# Altium PCB PCB1.PcbDoc
Units mm, origin at the board's own origin, x right, y up, seen from the top; angles counter-clockwise.
Board outline 52 x 75 mm, 2 copper layers (Top Layer, Bottom Layer); 11 components, 25 nets, 104 pads, 6 vias.
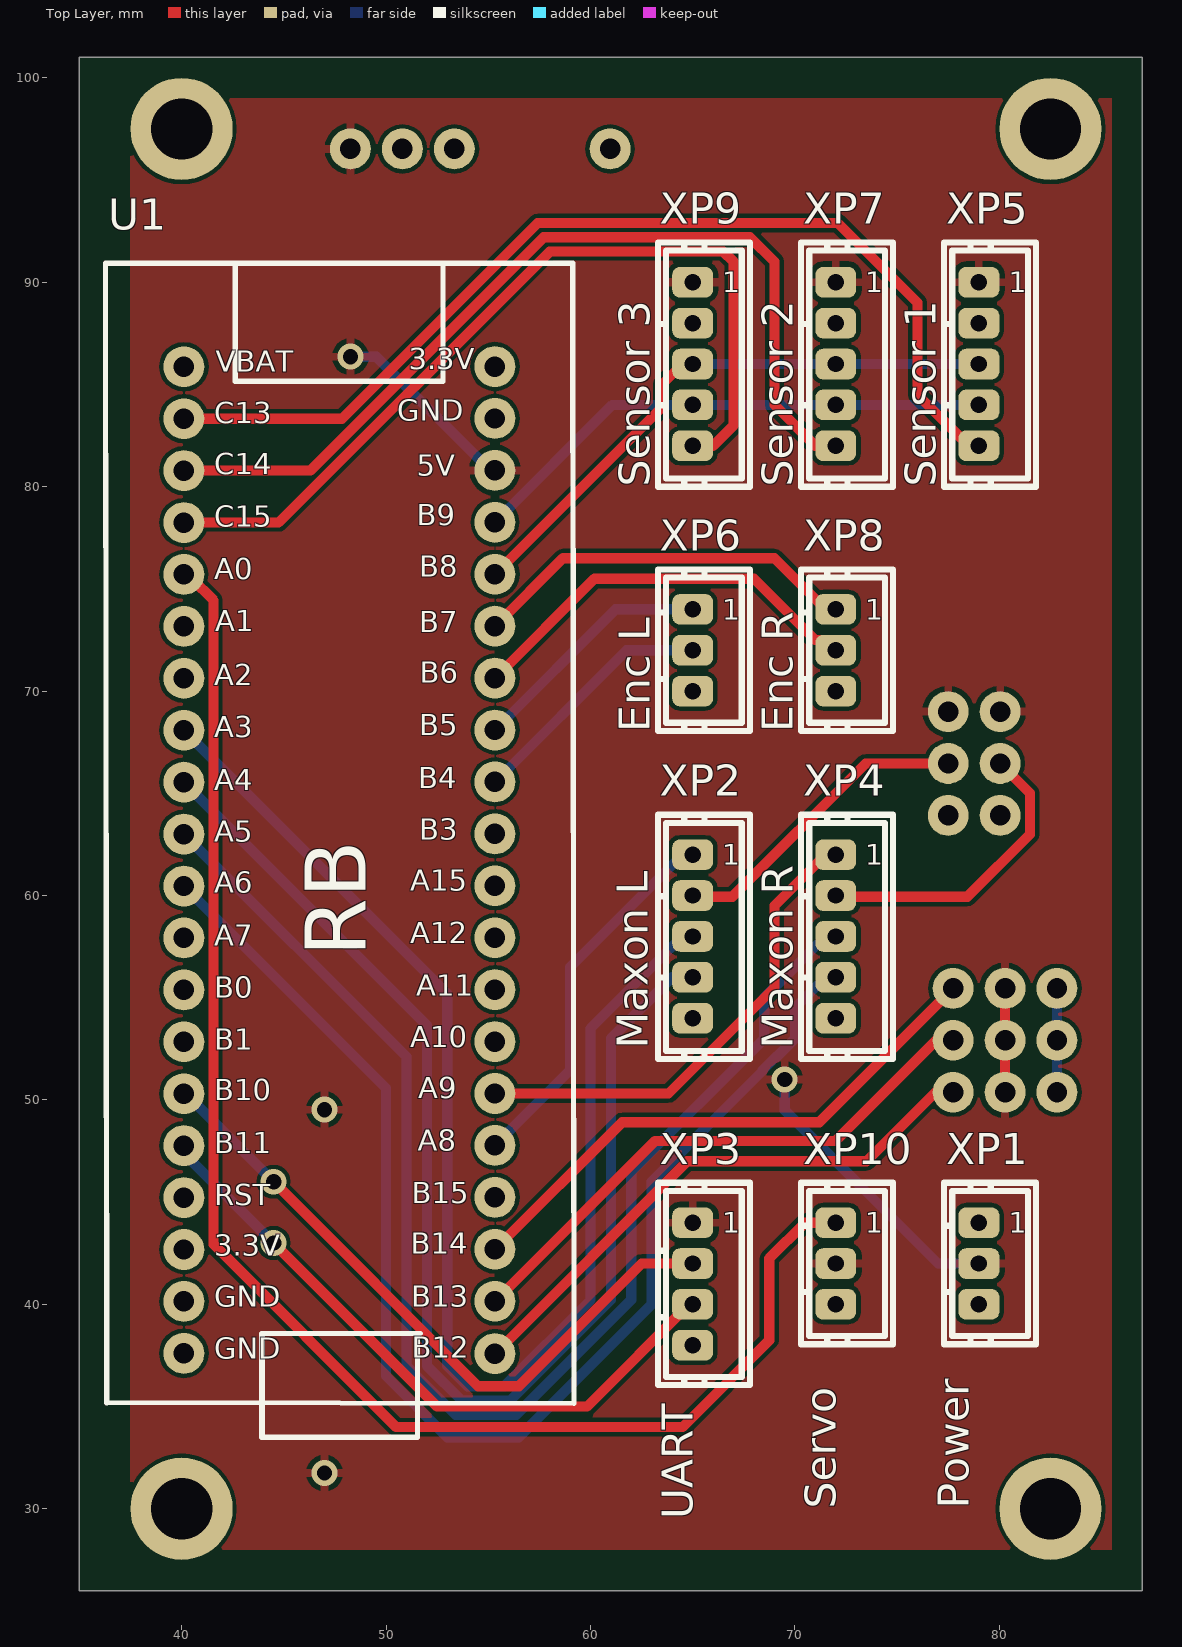
[diagram p0: Top Layer view]
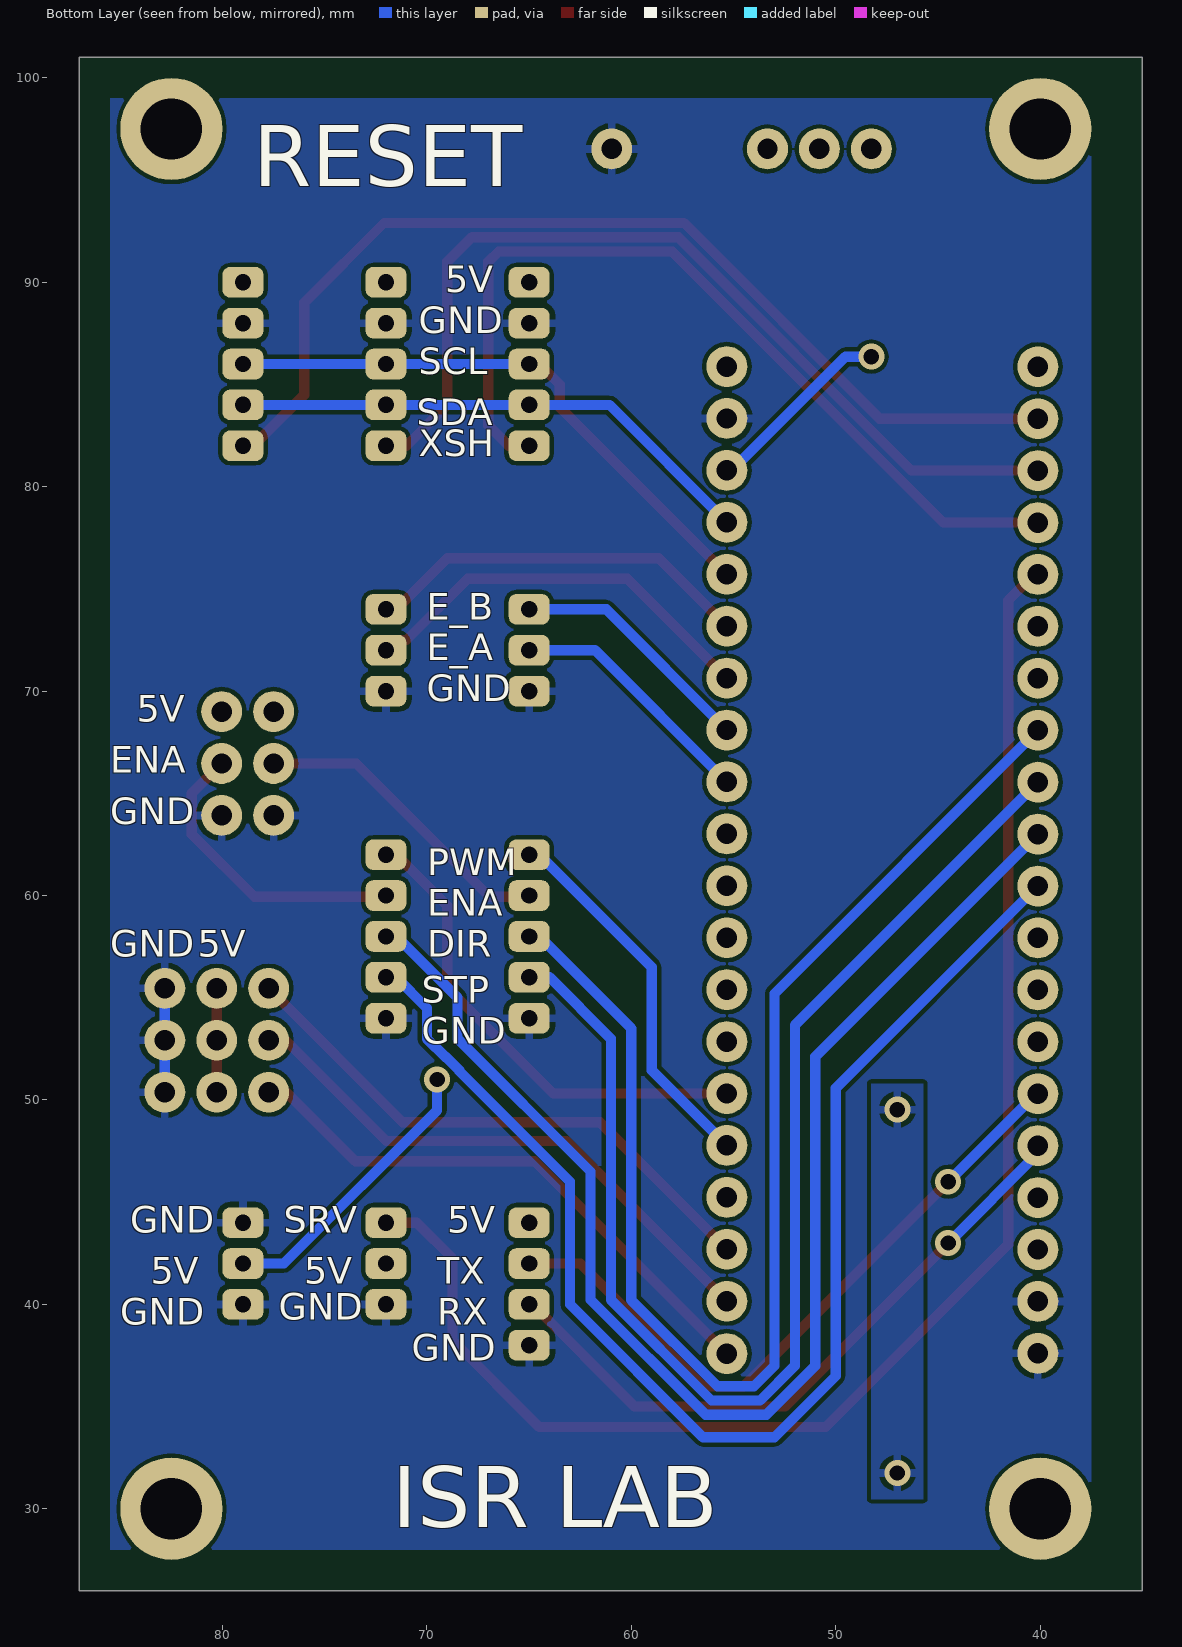
[diagram p1: Bottom Layer view, seen from below]
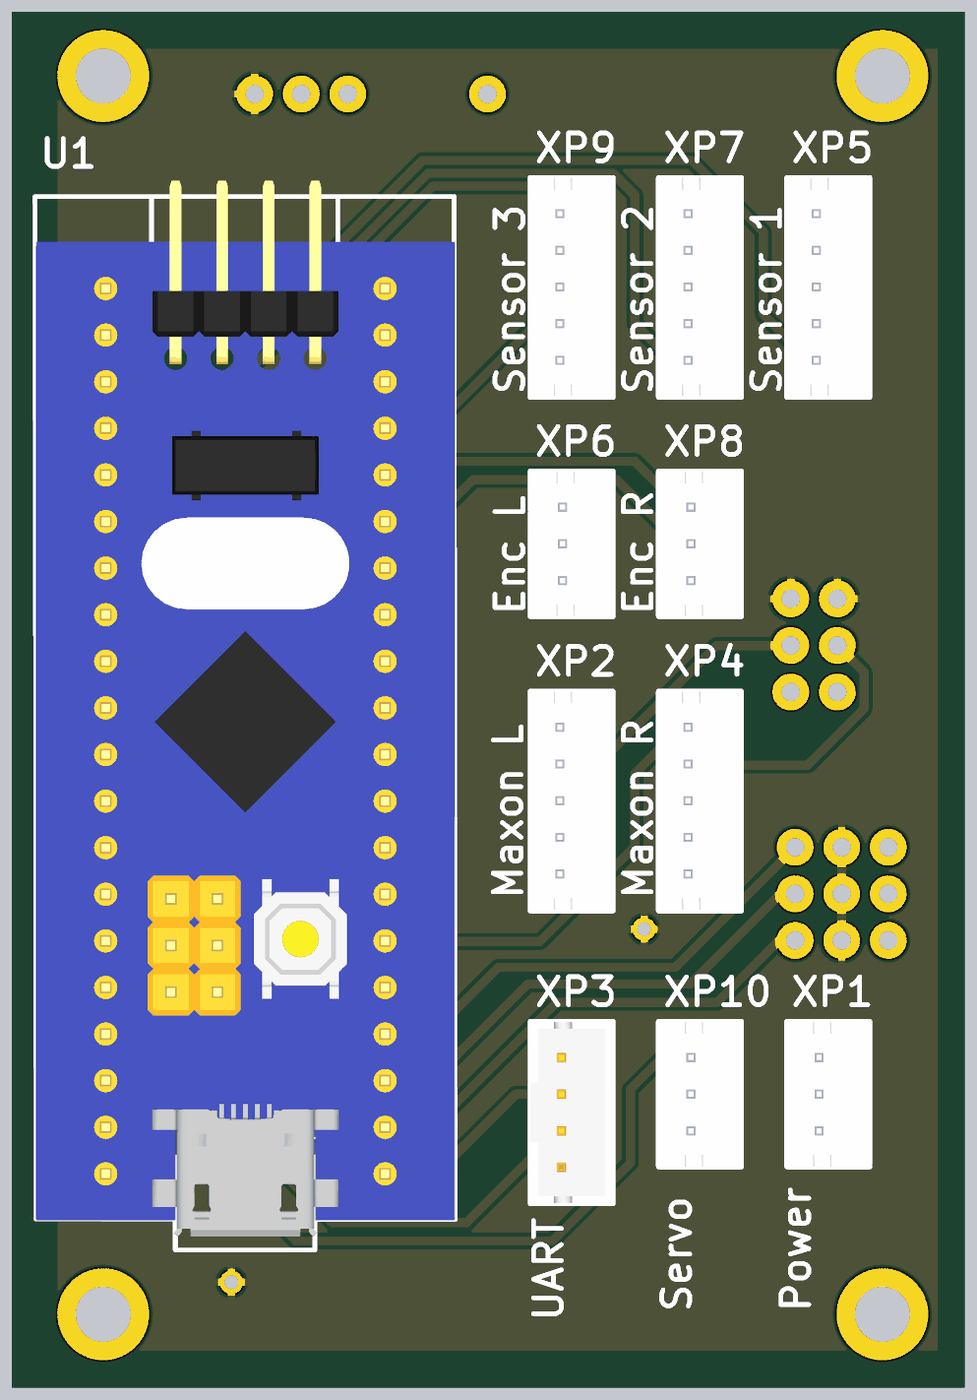
[diagram p2: 3D render of the assembled board from above, using the file's embedded part models]

## Layer stack, top to bottom
Top Solder: solder mask 0.0102, Solder Resist, Dk 3.5
Top Layer: signal copper 0.0356
Dielectric 1: dielectric 0.32, FR-4, Dk 4.8
Bottom Layer: signal copper 0.0356
Bottom Solder: solder mask 0.0102, Solder Resist, Dk 3.5

## Board outline
35,26 35,101 87,101 87,26

## Design rules (kind name [scope] priority, off if disabled: settings)
Clearance [All] p1: gap=0.2 ignorepadtopadclearanceinfootprint=FALSE except(0: Arc-Hole Track-Hole SMDPad-Hole THPad-Hole Via-Hole Fill-Hole Poly-Hole Region-Hole Text-Hole)
PlaneConnect [All] p1: planeconnectstyle=Relief reliefexpansion=0.508 reliefentries=4 reliefconductorwidth=0.4 reliefairgap=0.254
PolygonConnect [All] p1: connectstyle=Relief reliefconductorwidth=0.4 reliefentries=4 polygonreliefangle="90 Angle" airgapwidth=0.254
RoutingVias [All] p1: holewidth=1 width=1.25 viastyle="Through Hole" minholewidth=0.75 minwidth=1 maxholewidth=1.5 maxwidth=1.75
SolderMaskExpansion [All] p1: expansion=0.102
Width [All] p1: maxlimit=0.5 minlimit=0.125 preferedwidth=0.4
29 further rules are at their usual default settings.

## Components (designator, comment, footprint, x,y, rotation, side; value= is the part's Value field where it differs from the comment)
U1 "STM32F103C8T6" "Stm32 BluePill" 47.5,67.5 r0 top
XP1 "Power" B3B-PH-K-S 79,44 r270 top
XP2 "Maxon L" B5B-PH-K-S 65,62 r270 top
XP3 "UART" B4B-PH-K-S 65,44 r270 top
XP4 "Maxon R" B5B-PH-K-S 72,62 r270 top
XP5 "Sensor 1" B5B-PH-K-S 79,90 r270 top
XP6 "Enc L" B3B-PH-K-S 65,74 r270 top
XP7 "Sensor 2" B5B-PH-K-S 72,90 r270 top
XP8 "Enc R" B3B-PH-K-S 72,74 r270 top
XP9 "Sensor 3" B5B-PH-K-S 65,90 r270 top
XP10 "Servo" B3B-PH-K-S 72,44 r270 top

## Footprints (in the part's own frame and the unit in brackets; to place one, negate y for a bottom-side part, rotate by r counter-clockwise, add the part's x,y. Pads: shape width x height; smd on the part's side, far side on the other; paste and mask are expansions set on the pad)
B3B-PH-K-S [mm]
  rrect50% 1.5x2 hole 0.8: 1(0,0) 2(2,0) 3(4,0)
  silkscreen extent -1.95,-1.7 5.95,2.8, body extent -1.95,-1.65 5.95,2.85, height 6
B4B-PH-K-S [mm]
  rrect50% 1.5x2 hole 0.8: 1(0,0) 2(2,0) 3(4,0) 4(6,0)
  silkscreen extent -1.95,-1.7 7.95,2.8, body extent -1.95,-1.7 7.95,2.8, height 6.05
B5B-PH-K-S [mm]
  rrect50% 1.5x2 hole 0.8: 1(0,0) 2(2,0) 3(4,0) 4(6,0) 5(8,0)
  silkscreen extent -1.95,-1.7 10,2.8, body extent -1.95,-1.8 9.95,2.7, height 6
"Stm32 BluePill" [mm]
  round 2 hole 1: 1(7.828,-29.909) 2(7.828,-27.343) 3(7.828,-24.803) 4(7.828,-22.263) 5(7.828,-19.723) 6(7.828,-17.183) 7(7.828,-14.643) 8(7.828,-12.103) 9(7.828,-9.563) 10(7.828,-7.023) 11(7.828,-4.483) 12(7.828,-1.943) 13(7.828,0.597) 14(7.828,3.137) 15(7.828,5.677) 16(7.828,8.217) 17(7.828,10.757) 18(7.828,13.297) 19(7.828,15.837) 20(7.828,18.377) 21(-7.386,18.366) 22(-7.386,15.826) 23(-7.386,13.286) 24(-7.386,10.746) 25(-7.386,8.206) 26(-7.386,5.666) 27(-7.386,3.126) 28(-7.386,0.586) 29(-7.386,-1.954) 30(-7.386,-4.494) 31(-7.386,-7.034) 32(-7.386,-9.574) 33(-7.386,-12.114) 34(-7.386,-14.654) 35(-7.386,-17.194) 36(-7.386,-19.734) 37(-7.386,-22.274) 38(-7.386,-24.814) 39(-7.386,-27.354) 40(-7.386,-29.894)
  silkscreen extent -11.22,-34 11.69,23.43, body extent -11.18,-33.27 11.68,24.29, height 12.31

## Part data
U1: library part BluePill, "Designed By @Alixahedi"
XP1 XP6 XP8 XP10: library part B3B-PH-K-S, Manufacturer="JST Corporation", Datasheet=https://static.chipdip.ru/lib/667/DOC012667266.pdf, Group="Соединение контактное типа штырь", Name="B4B-PH-K-S; PHR-4; SPH-002T-P0.5*"
XP2 XP4 XP5 XP7 XP9: library part B5B-PH-K-S
XP3: library part B4B-PH-K-S, Manufacturer="JST Corporation", Datasheet=https://static.chipdip.ru/lib/667/DOC012667266.pdf, Group="Соединение контактное типа штырь", Name="B4B-PH-K-S; PHR-4; SPH-002T-P0.5*"

## Free pads (board coordinates)
  round 5 hole 3: 4(40,30) 4(40,97.5) 4(82.5,30) 4(82.5,97.5)
  round 2 hole 1: 5(48.26,96.52) 5(50.8,96.52) 5(53.34,96.52) 5(60.96,96.52) 5(77.5,63.92) 5(77.5,66.46) 5(77.5,69) 5(77.74,50.38) 5(77.74,52.92) 5(77.74,55.46) 5(80.04,63.92) 5(80.04,66.46) 5(80.04,69) 5(80.28,50.38) 5(80.28,52.92) 5(80.28,55.46) 5(82.82,50.38) 5(82.82,52.92) 5(82.82,55.46)

## Via types
v1: diameter 1.27, hole 0.75, Top Layer to Bottom Layer, 6 vias

## Nets (pads, with @x,y where several pads share a name; then routed paths per layer and width w, separated by ;. In a path a pad name is that pad's centre, name@x,y a point inside that pad or via, vN(x,y) a via of type N, cw(c..) or ccw(c..) an arc to the next point about the centre after c; other vN are vias at no path point)
5V: pad.5@48.26,96.52 pad.5@77.5,69 pad.5@80.04,69 pad.5@80.28,50.38 pad.5@80.28,52.92 pad.5@80.28,55.46 U1.18 XP1.2 XP3.1 XP5.1 XP7.1 XP9.1 XP10.2 | length 28.6
  Top Layer w0.5: pad.5@80.28,50.38 80.28,52.92 pad.5@80.28,55.46
  Bottom Layer w0.5: v1(48.26,86.36) 49.53,86.36 55.093,80.797 U1.18 ; v1(69.5,51) 69.5,49.5 77,42 XP1.2
  other v1: 46.99,31.75 46.99,49.53
DIR_L: U1.28 XP2.3 | length 65.7
  Bottom Layer w0.5: U1.28 53,55.2 53,37 54,36 55.787,36 60,40.213 60,53.5 64.5,58 XP2.3
DIR_R: U1.30 XP4.3 | length 67
  Bottom Layer w0.5: U1.30 51,52.12 51,37 53.4,34.6 56.367,34.6 62,40.233 62,46.5 68.5,53 68.5,55 71.5,58 XP4.3
ENA_L: pad.5@77.5,66.46 XP2.2 | length 15.2
  Top Layer w0.5: XP2.2@65,59.937 66.937,59.937 73.46,66.46 pad.5@77.5,66.46
ENA_R: pad.5@80.04,66.46 XP4.2 | length 14.8
  Top Layer w0.5: XP4.2@72,59.937 78.437,59.937 81.5,63 81.5,65 pad.5@80.04,66.46
ENC_LA: U1.12 XP6.2 | length 12.3
  Bottom Layer w0.5: U1.12 61.771,72 XP6.2
ENC_LB: U1.13 XP6.1 | length 12.1
  Bottom Layer w0.5: U1.13 61.231,74 XP6.1
ENC_RA: U1.14 XP8.2 | length 20.1
  Top Layer w0.5: U1.14 60.191,75.5 68,75.5 71,72.5 71.5,72.5 XP8.2
ENC_RB: U1.15 XP8.1 | length 19.1
  Top Layer w0.5: U1.15 58.651,76.5 69,76.5 71.5,74 XP8.1
GND: pad.5@60.96,96.52 pad.5@77.5,63.92 pad.5@80.04,63.92 pad.5@82.82,50.38 pad.5@82.82,52.92 pad.5@82.82,55.46 U1.19 U1.39 U1.40 XP1.1 XP1.3 XP2.5 XP3.4 XP4.5 XP5.2 XP6.3 XP7.2 XP8.3 XP9.2 XP10.3 | length 5.1
  Bottom Layer w0.5: pad.5@82.82,50.38 82.82,52.92 pad.5@82.82,55.46
PB12: pad.5@77.74,50.38 U1.1 | length 27.7
  Top Layer w0.5: U1.1 64.737,47 73.5,47 76.88,50.38 pad.5@77.74,50.38
PB13: pad.5@77.74,52.92 U1.2 | length 27.7
  Top Layer w0.5: U1.2 63.171,48 72,48 76.92,52.92 pad.5@77.74,52.92
PB14: pad.5@77.74,55.46 U1.3 | length 27.7
  Top Layer w0.5: U1.3 61.546,48.915 71.195,48.915 pad.5@77.74,55.46
PWM_L: U1.5 XP2.1 | length 18.5
  Bottom Layer w0.5: U1.5 59,51.449 59,56.5 64.5,62 XP2.1
PWM_R: U1.6 XP4.1 | length 23.9
  Top Layer w0.5: U1.6 63.817,50.317 69,55.5 69,59.5 71.5,62 XP4.1
RX: U1.36 XP3.3 | length 32.5
  Top Layer w0.5: v1(44.5,43) 52.5,35 59.833,35 64.833,40 XP3.3
  Bottom Layer w0.5: U1.36 40.114,47.386 v1(44.5,43)
SCL: U1.16 XP5.3 XP7.3 XP9.3 | length 28.6
  Top Layer w0.5: U1.16 63.5,83.889 63.5,85 64.5,86 XP9.3
  Bottom Layer w0.5: XP9.3 XP7.3 XP5.3
SDA: U1.17 XP5.4 XP7.4 XP9.4 | length 26.1
  Bottom Layer w0.5: U1.17 61.071,84 XP9.4 XP7.4 XP5.4
SERVO: U1.25 XP10.1 | length 74.2
  Top Layer w0.5: U1.25 40.114,75.5 40.5,75.5 41.564,74.436 41.564,42.936 50.5,34 64.5,34 68.75,38.25 68.75,42.25 70.5,44 XP10.1
STP_L: U1.29 XP2.4 | length 63.2
  Bottom Layer w0.5: U1.29 52,53.66 52,37 53.7,35.3 56.077,35.3 61,40.223 61,53 64,56 XP2.4
STP_R: U1.31 XP4.4 | length 65.5
  Bottom Layer w0.5: U1.31@40.534,60.466 U1.31 50,50.58 50,36.5 53,33.5 56.5,33.5 63,40 63,46 68.415,51.415 68.415,51.449 69.051,52.085 69.085,52.085 70,53 70,54.5 71.5,56 XP4.4
TX: U1.35 XP3.2 | length 33.3
  Top Layer w0.5: v1(44.5,46) 54.5,36 56.5,36 62.5,42 XP3.2
  Bottom Layer w0.5: U1.35 40.194,50.306 v1(44.5,46)
XSHUT_1: U1.22 XP5.5 | length 50
  Top Layer w0.5: U1.22 47.846,83.326 57.42,92.9 72.1,92.9 76,89 76,84.5 78.5,82 XP5.5
XSHUT_2: U1.23 XP7.5 | length 44.9
  Top Layer w0.5: U1.23 46.296,80.786 57.71,92.2 67.8,92.2 69,91 69,84 71,82 XP7.5
XSHUT_3: U1.24 XP9.5 | length 43
  Top Layer w0.5: U1.24 44.746,78.246 58,91.5 66.5,91.5 67,91 67,83 66,82 XP9.5
pads on no net: U1.4 U1.7 U1.8 U1.9 U1.10 U1.11 U1.20 U1.21 U1.26 U1.27 U1.32 U1.33 U1.34 U1.37 U1.38

## Polygon pours and split planes (outlines as drawn)
5V on Top Layer "Top Layer-5V" (solid, remove dead copper, pour order 2): 37.5,99 85.5,99 85.5,28 37.5,28
no net on Top Layer "Top Layer-No Net" (solid, pour order 1): 37,99
no net on Bottom Overlay (solid, pour order 0): 6.9,67.9
GND on Bottom Layer "Bottom Layer-GND" (solid, remove dead copper, pour order 3): 37.5,99 85.5,99 85.5,28 37.5,28
5V on Bottom Layer "Bottom Layer-5V" (solid, pour order 0): 45.72,50.8 45.72,30.48 48.26,30.48 48.26,50.8

## Silkscreen, mask and mechanical layers (free items; w line width, h text height)
Top Overlay:
  text "RB" at 49,57 h3 r90
Bottom Overlay:
  text "RESET" at 78.5,94.7 h3
  text "5V" at 69.103,89.5 h1.3
  text "GND" at 70.403,87.5 h1.3
  text "SCL" at 70.403,85.5 h1.3
  text "SDA" at 70.5,83 h1.3
  text "XSH" at 70.403,81.5 h1.3
  text "E_B" at 70,73.5 h1.3
  text "E_A" at 70,71.5 h1.3
  text "GND" at 70,69.5 h1.3
  text "5V" at 84.2,68.5 h1.3
  text "ENA" at 85.5,66 h1.3
  text "GND" at 85.5,63.5 h1.3
  text "PWM" at 69.992,61 h1.3
  text "ENA" at 69.992,59 h1.3
  text "DIR" at 69.992,57 h1.3
  text "5V" at 81.2,57 h1.3
  text "GND" at 85.5,57 h1.3
  text "STP" at 70.246,54.746 h1.3
  text "GND" at 70.246,52.746 h1.3
  text "5V" at 69,43.5 h1.3
  text "SRV" at 77,43.5 h1.3
  text "GND" at 84.5,43.5 h1.3
  text "TX" at 69.5,41 h1.3
  text "5V" at 76,41 h1.3
  text "5V" at 83.5,41 h1.3
  text "GND" at 77.246,39.246 h1.3
  text "RX" at 69.5,39 h1.3
  text "GND" at 85,39 h1.3
  text "GND" at 70.746,37.246 h1.3
  text "ISR LAB" at 71.7,29.1 h3
Mechanical 1:
  the board outline again, w0.254

## Text inside footprints (layer, text, board x,y; h text height)
U1: Top Overlay "B12" at 51.249,37.045 h1.78; Top Overlay "GND" at 41.587,36.989 h1.78; Top Overlay "B13" at 51.239,39.554 h1.78; Top Overlay "GND" at 41.587,39.554 h1.78; Top Overlay "A1" at 41.658,72.58 h1.78; Top Overlay "A0" at 41.587,75.14 h1.78; Top Overlay "C14" at 41.587,80.271 h1.78; Top Overlay "C13" at 41.587,82.76 h1.78; Top Overlay "C15" at 41.587,77.705 h1.78; Top Overlay "B6" at 51.65,70.06 h1.78; Top Overlay "B4" at 51.587,64.909 h1.78; Top Overlay "B7" at 51.62,72.529 h1.78; Top Overlay "B14" at 51.219,42.125 h1.78; Top Overlay "B5" at 51.62,67.494 h1.78; Top Overlay "VBAT" at 41.66,85.28 h1.78; Top Overlay "A10" at 51.186,52.229 h1.78; Top Overlay "A12" at 51.186,57.315 h1.78; Top Overlay "A15" at 51.186,59.9 h1.78; Top Overlay "A9" at 51.587,49.74 h1.78; Top Overlay "B3" at 51.62,62.389 h1.78; Top Overlay "A11" at 51.473,54.749 h1.78; Top Overlay "A8" at 51.556,47.174 h1.78; Top Overlay "B15" at 51.249,44.609 h1.78; Top Overlay "3.3V" at 41.587,42.044 h1.78; Top Overlay "B1" at 41.587,52.108 h1.78; Top Overlay "B0" at 41.587,54.667 h1.78; Top Overlay "A7" at 41.587,57.213 h1.78; Top Overlay "A6" at 41.587,59.798 h1.78; Top Overlay "B11" at 41.587,47.053 h1.78; Top Overlay "B10" at 41.587,49.638 h1.78; Top Overlay "RST" at 41.587,44.507 h1.78; Top Overlay "A4" at 41.587,64.808 h1.78; Top Overlay "A3" at 41.587,67.393 h1.78; Top Overlay "A2" at 41.587,69.938 h1.78; Top Overlay "A5" at 41.587,62.287 h1.78; Top Overlay "GND" at 50.548,82.887 h1.78; Top Overlay "3.3V" at 51.112,85.401 h1.78; Top Overlay "B8" at 51.62,75.241 h1.78; Top Overlay "B9" at 51.493,77.781 h1.78; Top Overlay "5V" at 51.493,80.194 h1.78
XP1: Top Overlay "1" at 80.45,43.5 h1
XP2: Top Overlay "1" at 66.45,61.5 h1
XP3: Top Overlay "1" at 66.45,43.5 h1
XP4: Top Overlay "1" at 73.45,61.5 h1
XP5: Top Overlay "1" at 80.45,89.5 h1
XP6: Top Overlay "1" at 66.45,73.5 h1
XP7: Top Overlay "1" at 73.45,89.5 h1
XP8: Top Overlay "1" at 73.45,73.5 h1
XP9: Top Overlay "1" at 66.45,89.5 h1
XP10: Top Overlay "1" at 73.45,43.5 h1